# EAGLE board ISO_CAN_Module_x6 (EAGLE 9.5.2), part 1 of 2
DATE: 05.02.21; VERSION: V. 1.0
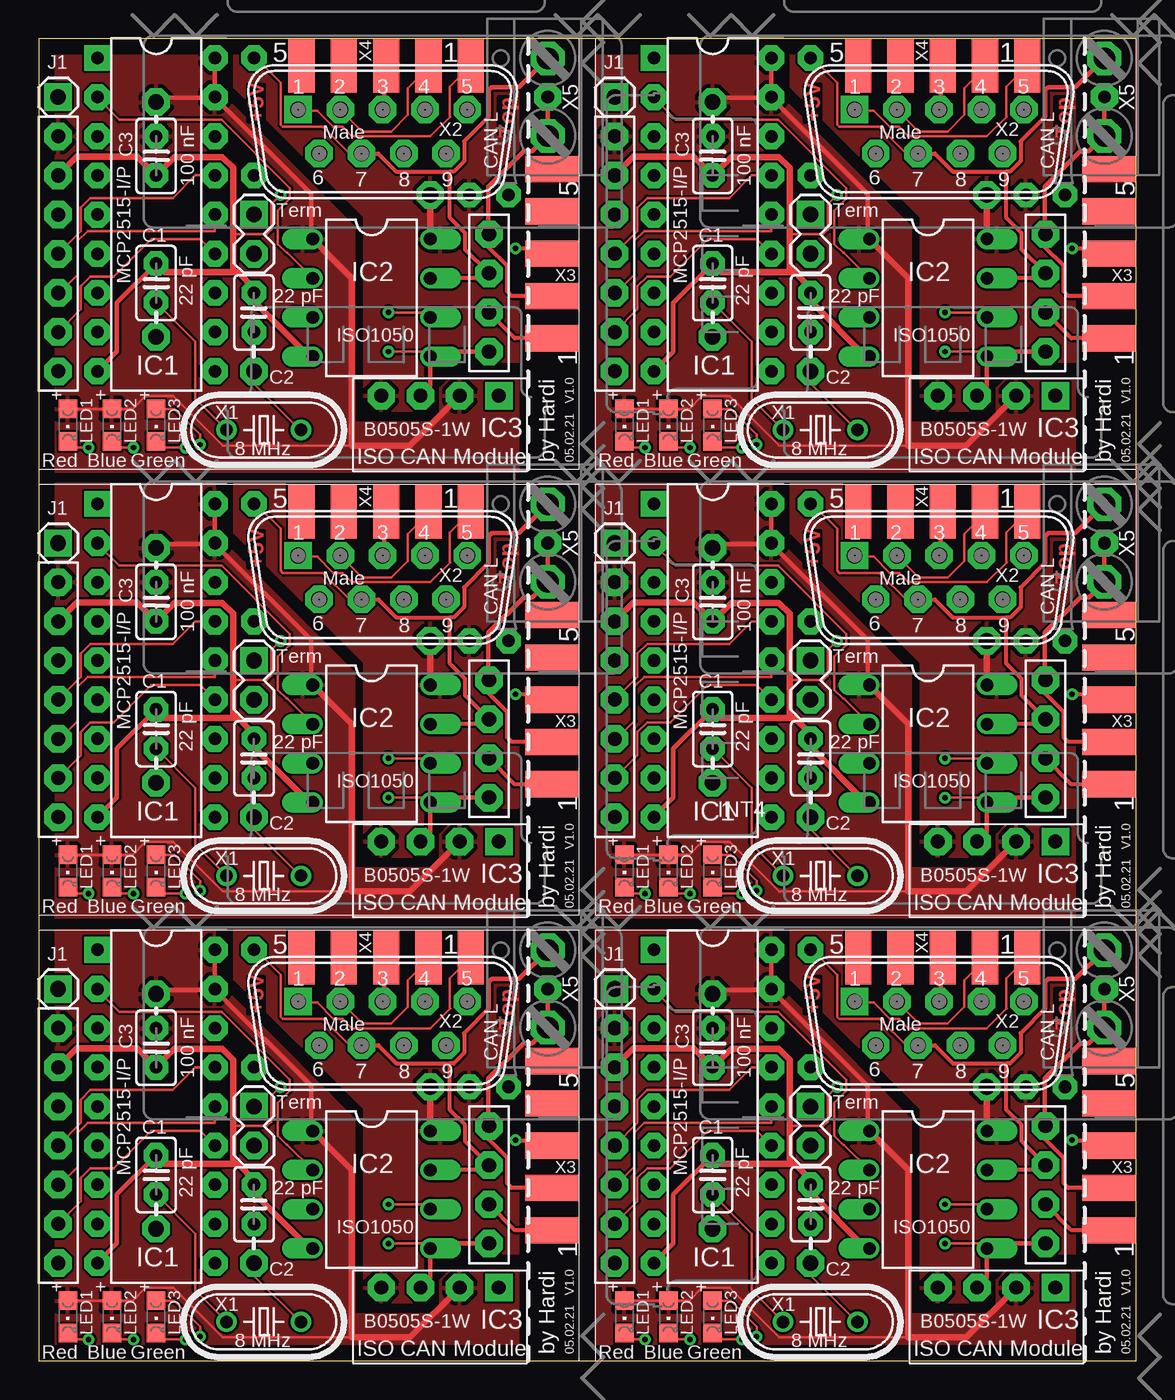
[diagram p0: board, top side]
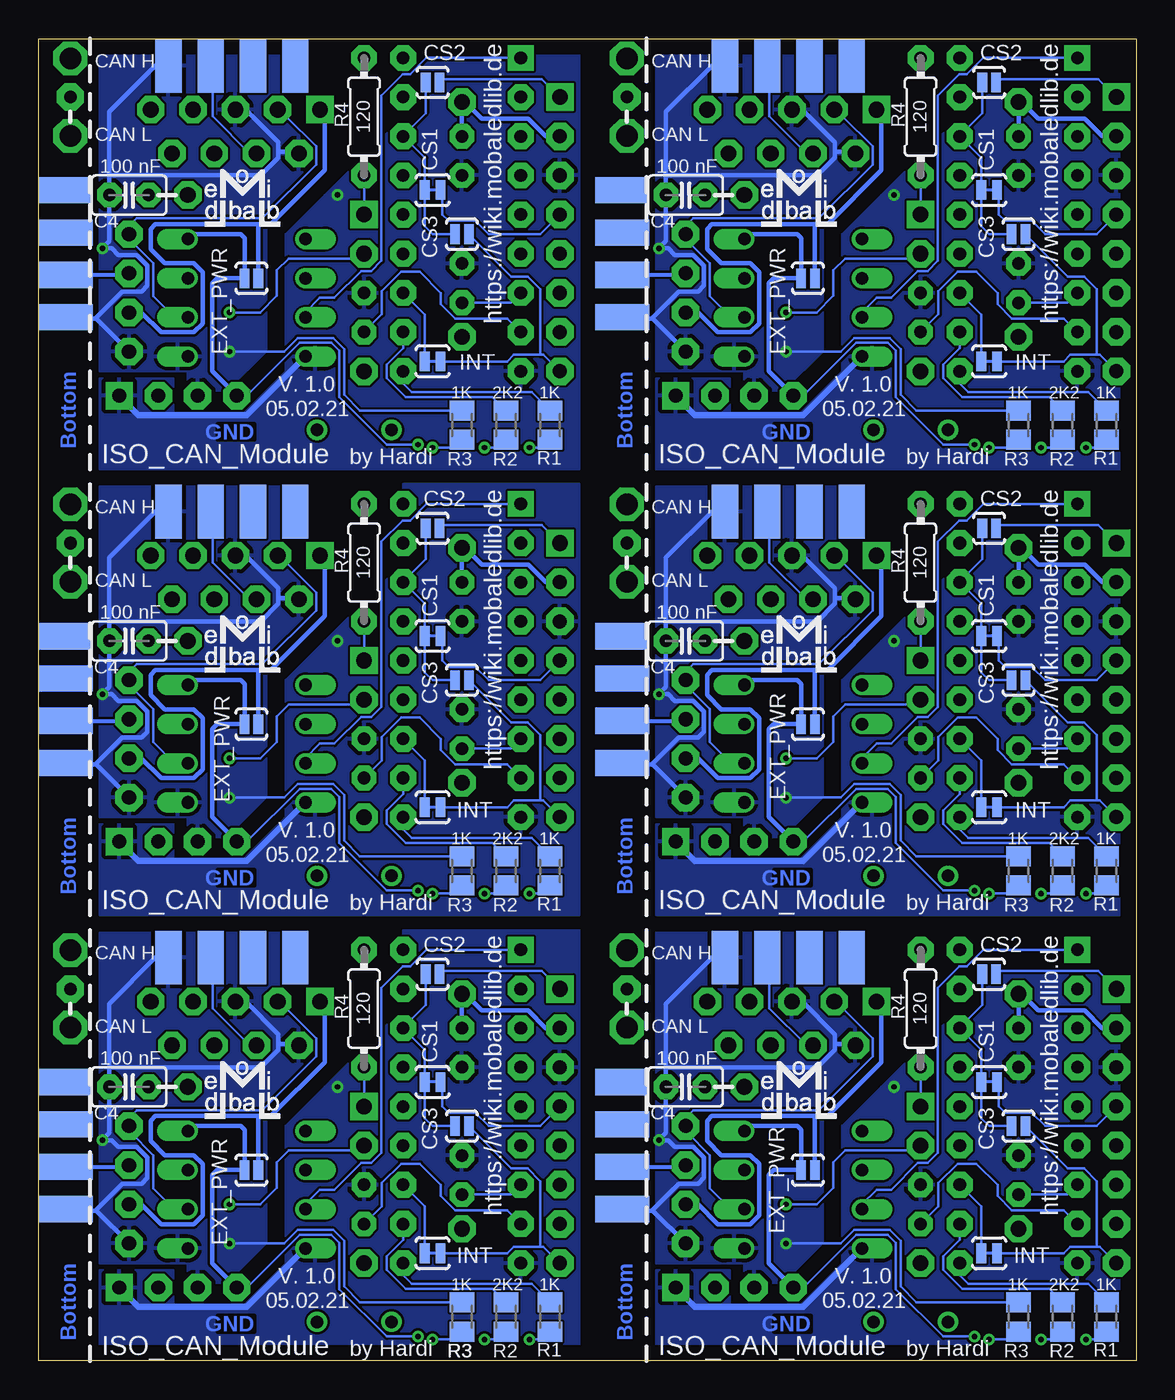
[diagram p1: board, bottom side, seen from below]

Size 71.17 x 85.78 mm. Coordinates in mm from the lower left corner, seen from the top.
Outline: 0,0 71.17,0 71.17,85.78 0,85.78 0,0
Copper layers (1*16): Top 0.035mm / dielectric 1.5mm / Bottom 0.035mm
Design rules "default": minimum track width 6mil, minimum drill 0.35mm, track to track 6mil, track to pad 6mil, pad to pad 6mil, via to via 6mil, smd to smd 6mil, copper to edge 40mil, drill to drill 6mil, minimum pad ring 10mil, minimum via ring 8mil, stop-mask expansion 4mil, vias tented up to drill 0mil, thermal gap 10mil

## Footprints (pad centres in the part's own frame; a part is rotated, then mirrored left to right if it is on the bottom)
C2.5-2 = drill 0.813 pad 1.6 octagon: 1 -1.27,0; 2 1.27,0
MCP2515_ISO_CAN = drill 0.914 pad 1.778 octagon: 1 0,0; 2 0,-2.54; 3 0,-5.08; 4 0,-7.62; 5 0,-10.16; 6 0,-12.7; 7 0,-15.24; 8 27.94,-6.35; 9 27.94,-8.89; 10 27.94,-11.43; 11 27.94,-13.97
1X02 = drill 1.016 pad 1.778 square: 1 0,0 | drill 1.016 pad 1.778 octagon: 2 2.54,0
SJ_2S-TRACE = smd 0.635 x 1.27: 1 -0.508,0; 2 0.508,0
SJ_2S-NO = smd 0.635 x 1.27: 1 -0.45,0; 2 0.45,0
DIL18 = drill 0.813 pad 1.676 square: 1 -10.16,-3.81 | drill 0.813 pad 1.676 octagon: 2 -7.62,-3.81; 3 -5.08,-3.81; 4 -2.54,-3.81; 5 0,-3.81; 6 2.54,-3.81; 7 5.08,-3.81; 8 7.62,-3.81; 9 10.16,-3.81; 10 10.16,3.81; 11 7.62,3.81; 12 5.08,3.81; 13 2.54,3.81; 14 0,3.81; 15 -2.54,3.81; 16 -5.08,3.81; 17 -7.62,3.81; 18 -10.16,3.81
DIL08 = drill 0.813 pad 1.27 offset: 1 -3.81,-3.81; 2 -1.27,-3.81; 3 1.27,-3.81; 4 3.81,-3.81; 5 3.81,3.81; 6 1.27,3.81; 7 -1.27,3.81; 8 -3.81,3.81
DCDC-TEA_NME = drill 0.9 pad 1.778 square: G_IN 0,0 | drill 0.9 pad 1.778 octagon: G_OUT 5.08,0; V_IN 2.54,0; V_OUT 7.62,0
1X01 = drill 1.016 pad 1.778 square: 1 0,0
1X01S = drill 1.016 pad 1.778 octagon: 1 0,0
CHIPLED_0805 = smd 1.2 x 1.2: A 0,-1.05; C 0,1.05
M0805 = smd 1.3 x 1.6: 1 -0.95,0; 2 0.95,0
0204/7 = drill 0.813 pad 1.676 octagon: 1 -3.81,0; 2 3.81,0
HC49U-V = drill 0.813: 1 -2.413,0; 2 2.413,0
M09VB = drill 1.016 pad 1.778 square: 1 5.486,-1.422 | drill 1.016 pad 1.778 octagon: 2 2.743,-1.422; 3 0,-1.422; 4 -2.743,-1.422; 5 -5.486,-1.422; 6 4.115,1.422; 7 1.372,1.422; 8 -1.372,1.422; 9 -4.115,1.422
M09D = smd 1.7 x 3.5: 1 5.486,-6.045; 2 2.743,-6.045; 3 0,-6.045; 4 -2.743,-6.045; 5 -5.486,-6.045 | smd 1.7 x 3.5 bottom: 6 4.115,-6.045; 7 1.372,-6.045; 8 -1.372,-6.045; 9 -4.115,-6.045
AK500/2+M = drill 1.397 pad 2.184 octagon: 1 -2.515,0; 2 2.515,0 | drill 0.813 pad 1.778 octagon: M 0,0

## Placement (x,y rotation side)
C1  22 pF  [C2.5-2]  7.62,12.06 90 top
C2  22 pF  [C2.5-2]  13.97,10.16 90 top
C3  100 nF  [C2.5-2]  7.62,20.32 270 top
C4  100 nF  [C2.5-2]  29.21,17.78 0 bottom
C5  22 pF  [C2.5-2]  7.62,40.99 90 top
C6  22 pF  [C2.5-2]  13.97,39.09 90 top
C7  100 nF  [C2.5-2]  7.62,49.25 270 top
C8  100 nF  [C2.5-2]  29.21,46.71 0 bottom
C9  22 pF  [C2.5-2]  7.62,69.92 90 top
C10  22 pF  [C2.5-2]  13.97,68.01 90 top
C11  100 nF  [C2.5-2]  7.62,78.17 270 top
C12  100 nF  [C2.5-2]  29.21,75.63 0 bottom
C13  22 pF  [C2.5-2]  43.71,12.06 90 top
C14  22 pF  [C2.5-2]  50.06,10.16 90 top
C15  100 nF  [C2.5-2]  43.71,20.32 270 top
C16  100 nF  [C2.5-2]  65.3,17.78 0 bottom
C17  22 pF  [C2.5-2]  43.71,40.99 90 top
C18  22 pF  [C2.5-2]  50.06,39.09 90 top
C19  100 nF  [C2.5-2]  43.71,49.25 270 top
C20  100 nF  [C2.5-2]  65.3,46.71 0 bottom
C21  22 pF  [C2.5-2]  43.71,69.92 90 top
C22  22 pF  [C2.5-2]  50.06,68.01 90 top
C23  100 nF  [C2.5-2]  43.71,78.17 270 top
C24  100 nF  [C2.5-2]  65.3,75.63 0 bottom
CAN1  MCP2515_ISO_CAN_PINS  [MCP2515_ISO_CAN]  1.27,21.59 0 top
CAN2  MCP2515_ISO_CAN_PINS  [MCP2515_ISO_CAN]  1.27,50.52 0 top
CAN3  MCP2515_ISO_CAN_PINS  [MCP2515_ISO_CAN]  1.27,79.44 0 top
CAN4  MCP2515_ISO_CAN_PINS  [MCP2515_ISO_CAN]  37.36,21.59 0 top
CAN5  MCP2515_ISO_CAN_PINS  [MCP2515_ISO_CAN]  37.36,50.52 0 top
CAN6  MCP2515_ISO_CAN_PINS  [MCP2515_ISO_CAN]  37.36,79.44 0 top
CON1  Term  [1X02]  13.97,45.44 270 top
CON2  Term  [1X02]  13.97,74.36 270 top
CON3  Term  [1X02]  50.06,16.51 270 top
CON4  Term  [1X02]  50.06,45.44 270 top
CON5  Term  [1X02]  50.06,74.36 270 top
CON8  Term  [1X02]  13.97,16.51 270 top
CS1  SOLDERJUMPERTRACE  [SJ_2S-TRACE]  9.52,18.1 180 bottom
CS2  SOLDERJUMPERNO  [SJ_2S-NO]  9.52,25.08 180 bottom
CS3  SOLDERJUMPERNO  [SJ_2S-NO]  7.62,15.24 180 bottom
CS4  SOLDERJUMPERNO  [SJ_2S-NO]  9.52,54.01 180 bottom
CS5  SOLDERJUMPERTRACE  [SJ_2S-TRACE]  9.52,47.02 180 bottom
CS6  SOLDERJUMPERNO  [SJ_2S-NO]  7.62,44.17 180 bottom
CS7  SOLDERJUMPERNO  [SJ_2S-NO]  9.52,82.94 180 bottom
CS8  SOLDERJUMPERTRACE  [SJ_2S-TRACE]  9.52,75.95 180 bottom
CS9  SOLDERJUMPERNO  [SJ_2S-NO]  7.62,73.09 180 bottom
CS10  SOLDERJUMPERNO  [SJ_2S-NO]  45.61,25.08 180 bottom
CS11  SOLDERJUMPERTRACE  [SJ_2S-TRACE]  45.61,18.1 180 bottom
CS12  SOLDERJUMPERNO  [SJ_2S-NO]  43.71,15.24 180 bottom
CS13  SOLDERJUMPERNO  [SJ_2S-NO]  45.61,54.01 180 bottom
CS14  SOLDERJUMPERTRACE  [SJ_2S-TRACE]  45.61,47.02 180 bottom
CS15  SOLDERJUMPERNO  [SJ_2S-NO]  43.71,44.17 180 bottom
CS16  SOLDERJUMPERNO  [SJ_2S-NO]  45.61,82.94 180 bottom
CS17  SOLDERJUMPERTRACE  [SJ_2S-TRACE]  45.61,75.95 180 bottom
CS18  SOLDERJUMPERNO  [SJ_2S-NO]  43.71,73.09 180 bottom
EXT_PWR  SOLDERJUMPERNO  [SJ_2S-NO]  21.27,12.38 0 bottom
EXT_PWR1  SOLDERJUMPERNO  [SJ_2S-NO]  21.27,41.31 0 bottom
EXT_PWR2  SOLDERJUMPERNO  [SJ_2S-NO]  21.27,70.24 0 bottom
EXT_PWR3  SOLDERJUMPERNO  [SJ_2S-NO]  57.36,12.38 0 bottom
EXT_PWR4  SOLDERJUMPERNO  [SJ_2S-NO]  57.36,41.31 0 bottom
EXT_PWR5  SOLDERJUMPERNO  [SJ_2S-NO]  57.36,70.24 0 bottom
IC1  MCP2515-I/P  [DIL18]  7.62,16.51 270 top
IC2  ISO1050  [DIL08]  21.59,11.11 270 top
IC3  B0505S-1W  [DCDC-TEA_NME]  29.84,4.76 180 top
IC4  ISO1050  [DIL08]  21.59,40.04 270 top
IC5  MCP2515-I/P  [DIL18]  7.62,45.44 270 top
IC6  B0505S-1W  [DCDC-TEA_NME]  29.84,33.69 180 top
IC7  ISO1050  [DIL08]  21.59,68.97 270 top
IC8  MCP2515-I/P  [DIL18]  7.62,74.36 270 top
IC9  B0505S-1W  [DCDC-TEA_NME]  29.84,62.62 180 top
IC10  ISO1050  [DIL08]  57.68,11.11 270 top
IC11  MCP2515-I/P  [DIL18]  43.71,16.51 270 top
IC12  B0505S-1W  [DCDC-TEA_NME]  65.93,4.76 180 top
IC13  ISO1050  [DIL08]  57.68,40.04 270 top
IC14  MCP2515-I/P  [DIL18]  43.71,45.44 270 top
IC15  B0505S-1W  [DCDC-TEA_NME]  65.93,33.69 180 top
IC16  ISO1050  [DIL08]  57.68,68.97 270 top
IC17  MCP2515-I/P  [DIL18]  43.71,74.36 270 top
IC18  B0505S-1W  [DCDC-TEA_NME]  65.93,62.62 180 top
INT  SOLDERJUMPERTRACE  [SJ_2S-TRACE]  9.52,6.98 180 bottom
INT1  SOLDERJUMPERTRACE  [SJ_2S-TRACE]  9.52,35.91 180 bottom
INT2  SOLDERJUMPERTRACE  [SJ_2S-TRACE]  9.52,64.84 180 bottom
INT3  SOLDERJUMPERTRACE  [SJ_2S-TRACE]  45.61,6.98 180 bottom
INT4  SOLDERJUMPERTRACE  [SJ_2S-TRACE]  45.61,35.91 180 bottom
INT5  SOLDERJUMPERTRACE  [SJ_2S-TRACE]  45.61,64.84 180 bottom
J1  [1X01]  1.27,24.13 0 top
J2  [1X01S]  7.62,8.57 0 top
J3  [1X01S]  13.97,6.35 0 top
J4  [1X01S]  7.62,23.81 0 top
J5  [1X01S]  25.4,17.78 0 top
J6  [1X01]  1.27,53.06 0 top
J7  [1X01S]  7.62,37.5 0 top
J8  [1X01S]  13.97,35.28 0 top
J9  [1X01S]  7.62,52.74 0 top
J10  [1X01S]  25.4,46.71 0 top
J11  [1X01]  1.27,81.98 0 top
J12  [1X01S]  7.62,66.43 0 top
J13  [1X01S]  13.97,64.2 0 top
J14  [1X01S]  7.62,81.67 0 top
J15  [1X01S]  25.4,75.63 0 top
J16  [1X01]  37.36,24.13 0 top
J17  [1X01S]  43.71,8.57 0 top
J18  [1X01S]  50.06,6.35 0 top
J19  [1X01S]  43.71,23.81 0 top
J20  [1X01S]  61.49,17.78 0 top
J21  [1X01]  37.36,53.06 0 top
J22  [1X01S]  43.71,37.5 0 top
J23  [1X01S]  50.06,35.28 0 top
J24  [1X01S]  43.71,52.74 0 top
J25  [1X01S]  61.49,46.71 0 top
J26  [1X01]  37.36,81.98 0 top
J27  [1X01S]  43.71,66.43 0 top
J28  [1X01S]  50.06,64.2 0 top
J29  [1X01S]  43.71,81.67 0 top
J30  [1X01S]  61.49,75.63 0 top
LED1  Red  [CHIPLED_0805]  1.9,2.86 180 top
LED2  Blue  [CHIPLED_0805]  4.76,2.86 180 top
LED3  Green  [CHIPLED_0805]  7.62,2.86 180 top
LED4  Blue  [CHIPLED_0805]  4.76,31.78 180 top
LED5  Red  [CHIPLED_0805]  1.9,31.78 180 top
LED6  Green  [CHIPLED_0805]  7.62,31.78 180 top
LED7  Blue  [CHIPLED_0805]  4.76,60.71 180 top
LED8  Red  [CHIPLED_0805]  1.9,60.71 180 top
LED9  Green  [CHIPLED_0805]  7.62,60.71 180 top
LED10  Blue  [CHIPLED_0805]  40.85,2.86 180 top
LED11  Red  [CHIPLED_0805]  37.99,2.86 180 top
LED12  Green  [CHIPLED_0805]  43.71,2.86 180 top
LED13  Blue  [CHIPLED_0805]  40.85,31.78 180 top
LED14  Red  [CHIPLED_0805]  37.99,31.78 180 top
LED15  Green  [CHIPLED_0805]  43.71,31.78 180 top
LED16  Blue  [CHIPLED_0805]  40.85,60.71 180 top
LED17  Red  [CHIPLED_0805]  37.99,60.71 180 top
LED18  Green  [CHIPLED_0805]  43.71,60.71 180 top
R1  1K  [M0805]  1.9,2.86 90 bottom
R2  2K2  [M0805]  4.76,2.86 90 bottom
R3  1K  [M0805]  7.62,2.86 270 bottom
R4  120  [0204/7]  13.97,22.86 90 bottom
R5  2K2  [M0805]  4.76,31.78 90 bottom
R6  1K  [M0805]  1.9,31.78 90 bottom
R7  120  [0204/7]  13.97,51.79 90 bottom
R8  1K  [M0805]  7.62,31.78 270 bottom
R9  2K2  [M0805]  4.76,60.71 90 bottom
R10  1K  [M0805]  1.9,60.71 90 bottom
R11  120  [0204/7]  13.97,80.71 90 bottom
R12  1K  [M0805]  7.62,60.71 270 bottom
R13  2K2  [M0805]  40.85,2.86 90 bottom
R14  1K  [M0805]  37.99,2.86 90 bottom
R15  120  [0204/7]  50.06,22.86 90 bottom
R16  1K  [M0805]  43.71,2.86 270 bottom
R17  2K2  [M0805]  40.85,31.78 90 bottom
R18  1K  [M0805]  37.99,31.78 90 bottom
R19  120  [0204/7]  50.06,51.79 90 bottom
R20  1K  [M0805]  43.71,31.78 270 bottom
R21  2K2  [M0805]  40.85,60.71 90 bottom
R22  1K  [M0805]  37.99,60.71 90 bottom
R23  120  [0204/7]  50.06,80.71 90 bottom
R24  1K  [M0805]  43.71,60.71 270 bottom
X1  8 MHz  [HC49U-V]  14.61,2.54 0 top
X2  Male  [M09VB]  22.31,21.89 180 top
X3  Male  [M09D]  39.37,13.97 270 top
X4  Male  [M09D]  22.54,32.21 0 top
X5  AK500/2+M  [AK500/2+M]  33.02,24.13 90 top
X6  8 MHz  [HC49U-V]  14.61,31.47 0 top
X7  Male  [M09D]  39.37,42.9 270 top
X8  Male  [M09VB]  22.31,50.82 180 top
X9  Male  [M09D]  22.54,61.13 0 top
X10  AK500/2+M  [AK500/2+M]  33.02,53.06 90 top
X11  8 MHz  [HC49U-V]  14.61,60.39 0 top
X12  Male  [M09D]  39.37,71.82 270 top
X13  Male  [M09VB]  22.31,79.75 180 top
X14  Male  [M09D]  22.54,90.06 0 top
X15  AK500/2+M  [AK500/2+M]  33.02,81.98 90 top
X16  8 MHz  [HC49U-V]  50.69,2.54 0 top
X17  Male  [M09D]  75.46,13.97 270 top
X18  Male  [M09VB]  58.4,21.89 180 top
X19  Male  [M09D]  58.63,32.21 0 top
X20  AK500/2+M  [AK500/2+M]  69.11,24.13 90 top
X21  8 MHz  [HC49U-V]  50.69,31.47 0 top
X22  Male  [M09D]  75.46,42.9 270 top
X23  Male  [M09VB]  58.4,50.82 180 top
X24  Male  [M09D]  58.63,61.13 0 top
X25  AK500/2+M  [AK500/2+M]  69.11,53.06 90 top
X26  8 MHz  [HC49U-V]  50.69,60.39 0 top
X27  Male  [M09D]  75.46,71.82 270 top
X28  Male  [M09VB]  58.4,79.75 180 top
X29  Male  [M09D]  58.63,90.06 0 top
X30  AK500/2+M  [AK500/2+M]  69.11,81.98 90 top

## Library data of the parts
C1-C24 = capacitor-wima
CAN1-CAN6 = ISO_CAN_Modul
CON1-CON5 CON8 J1-J30 = SparkFun-Connectors
CS1-CS18 EXT_PWR EXT_PWR1-EXT_PWR5 INT INT1-INT5 = SparkFun-Retired
IC1 IC5 IC8 IC11 IC14 IC17 = mcp2515
IC2 IC4 IC7 IC10 IC13 IC16 = texas
IC3 IC6 IC9 IC12 IC15 IC18 = MLL-Dominik-Hardi
LED1-LED18 = led
R1-R24 = resistor
X1 X6 X11 X16 X21 X26 = Discrete
X2-X4 X7-X9 X12-X14 X17-X19 X22-X24 X27-X29 = con-subd; OC_FARNELL: unknown; OC_NEWARK: unknown
X5 X10 X15 X20 X25 X30 = Arduino_fuer_LEDs_DCC_2

## Nets
+5V: C3.1 CAN1.1 IC1.17 IC1.18 IC2.1 IC3.V_IN J4.1 LED1.A LED2.A
+5V1: C7.1 CAN2.1 IC4.1 IC5.17 IC5.18 IC6.V_IN J9.1 LED4.A LED5.A
+5V2: C11.1 CAN3.1 IC7.1 IC8.17 IC8.18 IC9.V_IN J14.1 LED7.A LED8.A
+5V3: C15.1 CAN4.1 IC10.1 IC11.17 IC11.18 IC12.V_IN J19.1 LED10.A LED11.A
+5V4: C19.1 CAN5.1 IC13.1 IC14.17 IC14.18 IC15.V_IN J24.1 LED13.A LED14.A
+5V5: C23.1 CAN6.1 IC16.1 IC17.17 IC17.18 IC18.V_IN J29.1 LED16.A LED17.A
CAN_H: CAN1.9 IC2.7 R4.2 X2.7 X3.7 X4.7 X5.2
CAN_H1: CAN2.9 IC4.7 R7.2 X7.7 X8.7 X9.7 X10.2
CAN_H2: CAN3.9 IC7.7 R11.2 X12.7 X13.7 X14.7 X15.2
CAN_H3: CAN4.9 IC10.7 R15.2 X17.7 X18.7 X19.7 X20.2
CAN_H4: CAN5.9 IC13.7 R19.2 X22.7 X23.7 X24.7 X25.2
CAN_H5: CAN6.9 IC16.7 R23.2 X27.7 X28.7 X29.7 X30.2
CAN_L: CAN1.8 CON8.2 IC2.6 X2.2 X3.2 X4.2 X5.1 X5.M
CAN_L1: CAN2.8 CON1.2 IC4.6 X7.2 X8.2 X9.2 X10.1 X10.M
CAN_L2: CAN3.8 CON2.2 IC7.6 X12.2 X13.2 X14.2 X15.1 X15.M
CAN_L3: CAN4.8 CON3.2 IC10.6 X17.2 X18.2 X19.2 X20.1 X20.M
CAN_L4: CAN5.8 CON4.2 IC13.6 X22.2 X23.2 X24.2 X25.1 X25.M
CAN_L5: CAN6.8 CON5.2 IC16.6 X27.2 X28.2 X29.2 X30.1 X30.M
CS: CS1.2 CS2.2 CS3.2 IC1.16
CS1: CS4.2 CS5.2 CS6.2 IC5.16
CS2: CS7.2 CS8.2 CS9.2 IC8.16
CS3: CS10.2 CS11.2 CS12.2 IC11.16
CS4: CS13.2 CS14.2 CS15.2 IC14.16
CS5: CS16.2 CS17.2 CS18.2 IC17.16
CS_CAN0: CAN1.3 CS1.1
CS_CAN1: CAN2.3 CS5.1
CS_CAN2: CAN3.3 CS8.1
CS_CAN3: CAN4.3 CS11.1
CS_CAN4: CAN5.3 CS14.1
CS_CAN5: CAN6.3 CS17.1
CS_INT: CAN1.7 CS3.1 INT.1
CS_INT1: CAN2.7 CS6.1 INT1.1
CS_INT2: CAN3.7 CS9.1 INT2.1
CS_INT3: CAN4.7 CS12.1 INT3.1
CS_INT4: CAN5.7 CS15.1 INT4.1
CS_INT5: CAN6.7 CS18.1 INT5.1
CS_J1: CS2.1 J1.1
CS_J2: CS4.1 J6.1
CS_J3: CS7.1 J11.1
CS_J4: CS10.1 J16.1
CS_J5: CS13.1 J21.1
CS_J6: CS16.1 J26.1
GND: C1.2 C2.2 C3.2 CAN1.2 IC1.9 IC2.4 IC3.G_IN
GND1: C5.2 C6.2 C7.2 CAN2.2 IC4.4 IC5.9 IC6.G_IN
GND2: C4.1 CAN1.11 IC2.5 IC3.G_OUT R3.1 X2.3 X2.6 X3.3 X3.6 X4.3 X4.6
GND3: C8.1 CAN2.11 IC4.5 IC6.G_OUT R8.1 X7.3 X7.6 X8.3 X8.6 X9.3 X9.6
GND4: C9.2 C10.2 C11.2 CAN3.2 IC7.4 IC8.9 IC9.G_IN
GND5: C12.1 CAN3.11 IC7.5 IC9.G_OUT R12.1 X12.3 X12.6 X13.3 X13.6 X14.3 X14.6
GND6: C13.2 C14.2 C15.2 CAN4.2 IC10.4 IC11.9 IC12.G_IN
GND7: C16.1 CAN4.11 IC10.5 IC12.G_OUT R16.1 X17.3 X17.6 X18.3 X18.6 X19.3 X19.6
GND8: C17.2 C18.2 C19.2 CAN5.2 IC13.4 IC14.9 IC15.G_IN
GND9: C20.1 CAN5.11 IC13.5 IC15.G_OUT R20.1 X22.3 X22.6 X23.3 X23.6 X24.3 X24.6
GND10: C21.2 C22.2 C23.2 CAN6.2 IC16.4 IC17.9 IC18.G_IN
GND11: C24.1 CAN6.11 IC16.5 IC18.G_OUT R24.1 X27.3 X27.6 X28.3 X28.6 X29.3 X29.6
INT0: IC1.12 INT.2
INT1: IC5.12 INT1.2
INT2: IC8.12 INT2.2
INT3: IC11.12 INT3.2
INT4: IC14.12 INT4.2
INT5: IC17.12 INT5.2
LED1: LED1.C R1.1
LED2: LED2.C R2.1
LED3: LED3.C R3.2
LED4: LED4.C R5.1
LED5: LED5.C R6.1
LED6: LED6.C R8.2
LED7: LED7.C R9.1
LED8: LED8.C R10.1
LED9: LED9.C R12.2
LED10: LED10.C R13.1
LED11: LED11.C R14.1
LED12: LED12.C R16.2
LED13: LED13.C R17.1
LED14: LED14.C R18.1
LED15: LED15.C R20.2
LED16: LED16.C R21.1
LED17: LED17.C R22.1
LED18: LED18.C R24.2
N$1: IC5.11 R5.2
N$2: IC5.10 R6.2
N$3: IC8.11 R9.2
N$4: IC8.10 R10.2
N$5: IC11.11 R13.2
N$6: IC11.10 R14.2
N$7: IC14.11 R17.2
N$8: IC14.10 R18.2
N$9: IC1.11 R2.2
N$10: IC17.11 R21.2
N$11: IC17.10 R22.2
N$30: IC1.10 R1.2
OSC1: C2.1 IC1.8 J3.1 X1.2
OSC2: C1.1 IC1.7 J2.1 X1.1
OSC3: C5.1 IC5.7 J7.1 X6.1
OSC4: C6.1 IC5.8 J8.1 X6.2
OSC5: C9.1 IC8.7 J12.1 X11.1
OSC6: C10.1 IC8.8 J13.1 X11.2
OSC7: C13.1 IC11.7 J17.1 X16.1
OSC8: C14.1 IC11.8 J18.1 X16.2
OSC9: C17.1 IC14.7 J22.1 X21.1
OSC10: C18.1 IC14.8 J23.1 X21.2
OSC11: C21.1 IC17.7 J27.1 X26.1
OSC12: C22.1 IC17.8 J28.1 X26.2
RXCAN: IC1.2 IC2.2
RXCAN1: IC4.2 IC5.2
RXCAN2: IC7.2 IC8.2
RXCAN3: IC10.2 IC11.2
RXCAN4: IC13.2 IC14.2
RXCAN5: IC16.2 IC17.2
SCK: CAN1.6 IC1.13
SCK1: CAN2.6 IC5.13
SCK2: CAN3.6 IC8.13
SCK3: CAN4.6 IC11.13
SCK4: CAN5.6 IC14.13
SCK5: CAN6.6 IC17.13
SI: CAN1.5 IC1.14
SI1: CAN2.5 IC5.14
SI2: CAN3.5 IC8.14
SI3: CAN4.5 IC11.14
SI4: CAN5.5 IC14.14
SI5: CAN6.5 IC17.14
SO: CAN1.4 IC1.15
SO1: CAN2.4 IC5.15
SO2: CAN3.4 IC8.15
SO3: CAN4.4 IC11.15
SO4: CAN5.4 IC14.15
SO5: CAN6.4 IC17.15
TERM: CON8.1 R4.1
TERM1: CON1.1 R7.1
TERM2: CON2.1 R11.1
TERM3: CON3.1 R15.1
TERM4: CON4.1 R19.1
TERM5: CON5.1 R23.1
TXCAN: IC1.1 IC2.3
TXCAN1: IC4.3 IC5.1
TXCAN2: IC7.3 IC8.1
TXCAN3: IC10.3 IC11.1
TXCAN4: IC13.3 IC14.1
TXCAN5: IC16.3 IC17.1
VCC1: C8.2 EXT_PWR1.1 IC4.8 IC6.V_OUT J10.1 LED6.A
VCC2: C4.2 EXT_PWR.1 IC2.8 IC3.V_OUT J5.1 LED3.A
VCC2_EXT: CAN1.10 EXT_PWR.2 X2.1 X3.1 X4.1
VCC2_EXT1: CAN2.10 EXT_PWR1.2 X7.1 X8.1 X9.1
VCC2_EXT2: CAN3.10 EXT_PWR2.2 X12.1 X13.1 X14.1
VCC2_EXT3: CAN4.10 EXT_PWR3.2 X17.1 X18.1 X19.1
VCC2_EXT4: CAN5.10 EXT_PWR4.2 X22.1 X23.1 X24.1
VCC2_EXT5: CAN6.10 EXT_PWR5.2 X27.1 X28.1 X29.1
VCC3: C12.2 EXT_PWR2.1 IC7.8 IC9.V_OUT J15.1 LED9.A
VCC4: C16.2 EXT_PWR3.1 IC10.8 IC12.V_OUT J20.1 LED12.A
VCC5: C20.2 EXT_PWR4.1 IC13.8 IC15.V_OUT J25.1 LED15.A
VCC6: C24.2 EXT_PWR5.1 IC16.8 IC18.V_OUT J30.1 LED18.A